# Allegro board WIRELESS_BOARD_19may15_1310.brd
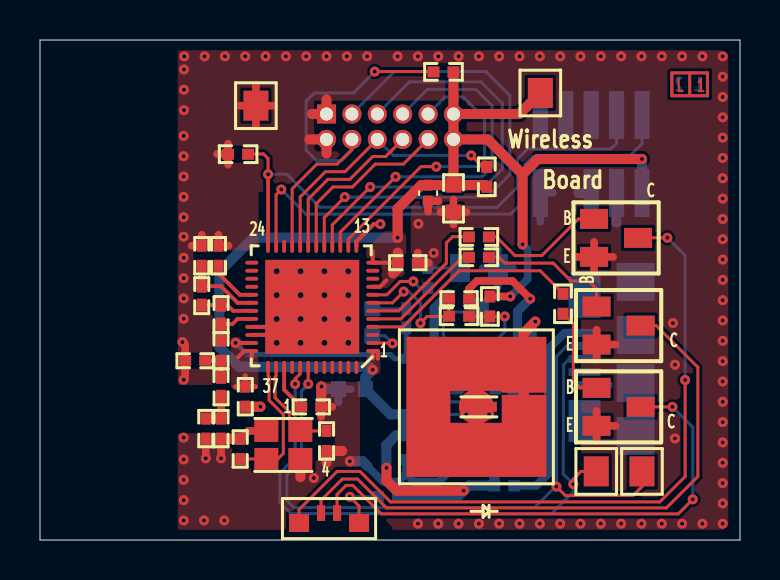
[diagram p0: board, top side]
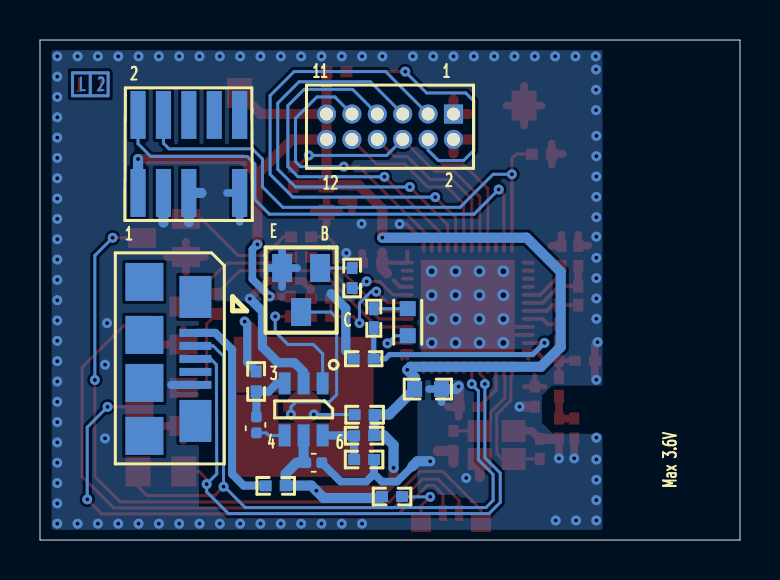
[diagram p1: board, bottom side, seen from below]

Outline 35 x 25 mm; copper layers: TOP, BOTTOM. Coordinates in mm from the lower left corner of the outline.
Outline path: 0,25 0,0 35,0 35,25 0,25

## Design rules (mm)
net group DEFAULT: nets DEC1 DEC2 GPIO_1 GPIO_2 GPIO_3 GPIO_4 GPIO_5 GPIO_6 LED_BLUE LED_GREEN LED_RED N13796 N13800 N17550 N6920326 N6921954 N6922014 N6922833 N6923020 N6923221 N69197330 N69197331 N69219020 N69227890 SCL SDA SNS SWDCLK SWDIO TOUCH_KEY TOUCHLIGHT UART_RX UART_TX XC1 XC2
net group POWER: nets ANT ANT1 ANT2 AVDD GND_SIGNAL N6850852 N6850940 N6930141 SNSK VDD VDD PA

## Placement (name value [footprint] x y rotation side)
C1  1uF  [C0402#2]  19.41 17.74 270 top
C2  4.7uF  [C0603]  20.68 17.07 270 top
C3  2.2nF  [C0402]  8.09 14.21 90 top
C4  47nF  [C0402]  8.93 14.21 90 top
C5  100nF  [C0402]  18.39 13.87 0 top
C6  2.2pF  [C0402]  9.05 9.46 270 top
C7  0.8pF  [C0402]  7.76 8.96 180 top
C8  1nF  [C0402]  10.26 7.17 270 top
C9  100nF  [C0402]  13.56 6.66 0 top
C10  1.5pF  [C0402]  8.29 5.57 270 top
C11  1.5pF  [C0402]  9.05 5.57 270 top
C12  12pF  [C0402]  14.33 4.95 90 top
C13  12pF  [C0402]  10.01 4.55 270 top
C14  1uF  [C0402]  18.81 9.06 0 bottom
C15  4.7uF  [C0603]  15.6 7.55 180 bottom
C17  6.8nF  [C0603#2]  24.18 6.16 270 bottom
C19  100nF  [C0402#2]  21.71 3.86 180 bottom
C29  100nF  [C0402]  20.95 12.06 0 top
D1  LED_3  [LED0402]  21.95 6.66 0 top
D2  RGB_LED  [LED4P_APFA3010SEEZGQBDC]  14.45 1.1 0 top
GND  TEST POINT  [TP]  10.79 21.72 0 top
L1  10nH  [L0402]  8.09 12.22 270 top
L2  4.7nH  [L0402]  9.05 11.27 270 top
L3  3.3nH  [L0402]  9.05 7.66 270 top
L4  15nH  [L0402]  18.31 11.09 270 bottom
L5  10uH  [L0603]  16.61 10.89 90 bottom
NOREF  -  []  0 0 90 top
NOREF#2  -  []  0 0 0 top
P1  20021112-00020T1LF  [CONN20PIN_20021112_RA]  14.33 21.3 0 top
P2  FTSH-105  [FTSH-105-01-L-DV]  27.56 19.3 180 bottom
Q1  NPN BCE  [SOT23]  28.8 15.11 0 top
Q2  NPN BCE  [SOT23]  28.93 10.72 0 top
Q3  NPN BCE  [SOT23]  28.93 6.66 0 top
Q5  NPN BCE  [SOT23]  21.95 12.5 270 bottom
R1  10K  [R0402]  20.18 23.42 0 top
R2  12K  [R0402]  9.91 19.3 0 top
R3  10K  [R0402]  22.35 18.16 270 top
R4  23K  [R0402]  21.95 15.17 0 top
R5  23K  [R0402]  21.95 14.15 0 top
R6  23K  [R0402]  26.16 11.81 270 top
R7  33  [R0402]  17.4 2.16 0 bottom
R11  23K  [R0402]  19.41 13.1 90 bottom
R12  DNM  [R0402]  22.48 11.68 90 top
R13  4.7K  [R0402]  24.18 7.93 270 bottom
R14  33  [R0402]  18.77 6.28 180 bottom
R16  DNM  [R0402]  23.22 2.72 180 bottom
R17  33  [R0402]  18.8 4.01 0 bottom
R18  DNM  [R0402]  18.8 5.23 180 bottom
R27  4.7K  [R0402]  20.95 11.18 180 top
RX  TEST POINT  [TP]  30.1 3.43 0 top
TX  TEST POINT  [TP]  27.81 3.43 0 top
U1  nRF51822-QFAA  [QFN40P600X600X90-48N]  13.61 11.66 0 top
U2  DNM  [TP_40RD_SMT]  21.82 6.66 0 top
U3  microusb  [USB_10118192AC]  28.51 9.06 270 bottom
U4  AT42QT1011  [SOP95P280X145-6N]  21.82 6.53 270 bottom
VDD  TEST POINT  [TP]  25.02 22.35 0 top
X2  16MHz  [BT-XTAL_2520]  12.17 4.75 180 top

## Library data of the parts
C1 C17 C19 = CAPACITOR: alternate symbols: (CAPC1005X60L,CAPC1005X60M)
C2 C29 = CAPACITOR
C3-C15 = CAPACITOR NON-POL
D1 = LED_3
D2 = RGB_LED
GND RX TX VDD = TEST POINT
L1-L5 = INDUCTOR
P1 = CONN RCPT 10x2_1
P2 = FTSH-105
Q1-Q3 Q5 = NPN BCE_0: User Part Number: PART_NO; Tolerance: TOLERANCE
R1-R7 R11-R14 R16-R18 R27 = RESISTOR
U1 = nRF51822-QFAA_0
U2 = Sense Electrode
U3 = microusb
U4 = AT42QT1012_0
X2 = CRYSTAL_1

## Footprints (pads in the part's own frame, mm; a bottom-side part is the same pattern mirrored in y, then rotated)
BT-XTAL_2520
  rect 1.199x1.1 smd: 1(-0.851,-0.701) 2(0.851,-0.701) 3(0.851,0.701) 4(-0.851,0.701)
C0402
  rect 0.599x0.5 smd: 1(-0.5,0) 2(0.5,0)
C0402#2
  custom 0.549x0.538 smd: 1(0,0) 2(0.8,0)
C0603
  rect 0.749x0.8 smd: 1(-0.673,0) 2(0.673,0)
C0603#2
  custom 0.549x0.538 smd: 1(0,0) 2(0.8,0)
CONN20PIN_20021112_RA
  rect 0.955x0.955 hole 0.65: 1(0,0)
  round 0.955 hole 0.65: 2(0,-1.27) 3(1.27,0) 4(1.27,-1.27) 5(2.54,0) 6(2.54,-1.27) 7(3.81,0) 8(3.81,-1.27) 9(5.08,0) 10(5.08,-1.27) 11(6.35,0) 12(6.35,-1.27)
FTSH-105-01-L-DV
  rect 0.759x2.398 smd: 1(-2.54,-1.951) 2(-2.54,1.951) 3(-1.27,-1.951) 4(-1.27,1.951) 5(0,-1.951) 6(0,1.951) 8(1.27,1.951) 9(2.54,-1.951) 10(2.54,1.951)
L0402
  rect 0.65x0.5 smd: 1(-0.475,0) 2(0.475,0)
L0603
  rect 0.749x0.8 smd: 1(-0.676,0) 2(0.676,0)
LED4P_APFA3010SEEZGQBDC
  rect 1.001x0.899 smd: 1(-1.501,-0.249) 2(1.501,-0.249)
  rect 0.406x0.787 smd: 3(0.401,0.249) 4(-0.401,0.249)
LED0402
  rect 0.701x0.5 smd: A(-0.549,0) K(0.549,0)
QFN40P600X600X90-48N
  oval 0.65x0.193 smd: 1(3.025,-2.207) 2(3.025,-1.806) 3(3.025,-1.405) 4(3.025,-1.003) 5(3.025,-0.602) 6(3.025,-0.201) 7(3.025,0.201) 8(3.025,0.602) 9(3.025,1.003) 10(3.025,1.405) 11(3.025,1.806) 12(3.025,2.207) 25(-3.025,2.207) 26(-3.025,1.806) 27(-3.025,1.405) 28(-3.025,1.003) 29(-3.025,0.602) 30(-3.025,0.201) 31(-3.025,-0.201) 32(-3.025,-0.602) 33(-3.025,-1.003) 34(-3.025,-1.405) 35(-3.025,-1.806) 36(-3.025,-2.207)
  oval 0.193x0.65 smd: 13(2.207,3.025) 14(1.806,3.025) 15(1.405,3.025) 16(1.003,3.025) 17(0.602,3.025) 18(0.201,3.025) 19(-0.201,3.025) 20(-0.602,3.025) 21(-1.003,3.025) 22(-1.405,3.025) 23(-1.806,3.025) 24(-2.207,3.025) 37(-2.207,-3.025) 38(-1.806,-3.025) 39(-1.405,-3.025) 40(-1.003,-3.025) 41(-0.602,-3.025) 42(-0.201,-3.025) 43(0.201,-3.025) 44(0.602,-3.025) 45(1.003,-3.025) 46(1.405,-3.025) 47(1.806,-3.025) 48(2.207,-3.025)
  rect 4.699x4.699 smd: 49(0,0)
R0402
  rect 0.599x0.551 smd: 1(-0.5,0) 2(0.5,0)
SOP95P280X145-6N
  rect 1.1x0.599 smd: 1(-1.3,0.95) 2(-1.3,0) 3(-1.3,-0.95) 4(1.3,-0.95) 5(1.3,0) 6(1.3,0.95)
SOT23
  rect 1.4x1.001 smd: B(-1.1,0.95) C(1.1,0) E(-1.1,-0.95)
TP
  rect 1.25x1.501 smd: 1(0,0)
TP_40RD_SMT
  custom 7x7 smd: 1(0,0)
USB_10118192AC
  rect 1.9x1.9 smd: (-3.851,-1.275) (-1.199,-1.275) (1.201,-1.275) (3.851,-1.275)
  rect 2.101x1.6 smd: (-3.099,1.275) (3.101,1.275)
  rect 0.399x1.6 smd: 1(-1.3,1.275) 2(-0.65,1.275) 3(0,1.275) 4(0.65,1.275) 5(1.3,1.275)

## Nets
AVDD: C8.1 C14.1 L4.2 U1.35(AVDD1) U1.36(AVDD)
GND_SIGNAL: C1.2 C2.2 C3.2 C4.2 C5.2 C7.2 C8.2 C9.2 C10.2 C11.2 C12.1 C13.1 C14.2 C15.2 C19.2 C29.2 GND.1 P1.1 P1.2 P2.3 P2.5 P2.9 Q1.E Q2.E Q3.E Q5.E R2.1 R17.1 U1.13(VSS) U1.33(VSS1) U1.34(VSS2) U1.49(EPAD) U3.5 U4.2(GND) X2.2 X2.4
VDD: C1.1 C2.1 C5.1 C15.1 C19.1 P1.11 P1.12 P2.1 R1.2 R3.2 R7.2 R12.2 R14.2 R16.2 R18.2 U1.1(VDD) U1.9(P0.05) U1.12(VDD1) U4.5(VDD) VDD.1
VDD PA: C3.1 L1.1 U1.30(VDD_PA)
ANT: C10.1 C11.1 L3.2
ANT1: L1.2 L2.1 U1.31(ANT1)
ANT2: C6.1 L2.2 U1.32(ANT2)
DEC1: C9.1 U1.39(DEC1)
DEC2: C4.1 U1.29(DEC2)
GPIO_1: P1.8 U1.19(P0.13)
GPIO_2: P1.10 U1.18(P0.12)
GPIO_3: P1.3 U1.17(P0.11)
GPIO_4: P1.5 U1.16(P0.10)
GPIO_5: P1.7 U1.15(P0.09)
GPIO_6: P1.9 U1.14(P0.08)
LED_BLUE: R5.1 U1.5(P0.01)
LED_GREEN: R6.1 U1.4(P0.00)
LED_RED: R4.1 U1.6(P0.02)
SCL: P1.4 R1.1 U1.21(P0.15)
SDA: P1.6 R3.1 U1.20(P0.14)
SNS: C17.2 U4.4(SNS)
SNSK: C17.1 R13.2 U4.3(SNSK)
SWDCLK: P2.4 R2.2 U1.24(SWDCLK)
SWDIO: P2.2 U1.23(SWDIO/NRESET)
TOUCH_KEY: C29.1 R27.2 U1.7(P0.03)
TOUCHLIGHT: R11.1 U1.8(P0.04)
UART_RX: RX.1 U1.42(P0.23) U3.2
UART_TX: TX.1 U1.41(P0.22) U3.3
XC1: C13.2 U1.37(XC1) X2.3
XC2: C12.2 U1.38(XC2) X2.1
N13796: L4.1 L5.2
N13800: L5.1 U1.2(DCC)
N17550: C6.2 C7.1 L3.1
N6850732: R12.1 R27.1 U4.1(OUT)
N6850852: R17.2 R18.1 U4.6(MODE)
N6850940: R13.1 U2.1
N6920326: D1.A(ANODE) R14.1
N6921954: D2.2(A) R7.1
N6922014: D2.1(R) Q1.C
N6922833: D2.4(B) Q2.C
N6923020: D2.3(G) Q3.C
N6923221: Q3.B R6.2
N6930141: R16.1 U3.1
N69197330: Q5.B R11.2
N69197331: D1.K(CATHODE) Q5.C
N69219020: Q1.B R4.2
N69227890: Q2.B R5.2

Pads without a net: P2 6 8 10; U1 3 10 11 22 25 26 27 28 40 43 44 45 46 47 48; U3 4

## Via types
v1: diameter 0.5, hole 0.201, TOP to BOTTOM, 133 vias
v2: diameter 0.599, hole 0.3, TOP to BOTTOM, 16 vias

## Routing (per net, layer and track width the routed paths; a pad name or vN(x,y) marks a point on that pad's centre or on a via; arc(x,y) is an arc through that point)
AVDD: length 14
  TOP w0.203: 10.59,9.06 U1.36 10.21,9.45 9.91,9.14 ; 9.78,9.85 U1.35
  TOP w0.254: C8.1 10.77,7.67 ; C8.1 10.26,8.22 ; C8.1 9.76,7.67 ; v1(9.78,9.86) 9.78,9.85
  BOTTOM w0.254: v1(9.78,9.86) 10.36,9.27 17.53,9.27 17.73,9.06 C14.1 L4.2
GND_SIGNAL: length 72.9
  TOP w0.203: U1.34 11.44,10.25 v2(11.83,9.86) ; U1.33 11.44,10.66 v2(11.83,11.05) ; v1(17.02,15.8) 16.69,15.8 15.82,14.93 U1.13
  TOP w0.381: 26.75,14.16 Q1.E ; Q1.E 27.7,13.4 ; Q1.E 27.7,14.91 ; Q1.E 28.66,14.16 ; 19.44,13.87 C5.2 18.89,14.37 ; 9.43,14.71 C4.2 8.93,15.27 ; C2.2 21.33,16.4 ; C2.2 20.68,17.03 ; C2.2 20.68,15.77 ; C2.2 20.02,16.4 ; 9.92,21.72 GND.1 ; GND.1 11.67,21.72 ; GND.1 10.79,22.72 ; GND.1 10.79,20.71 ; Q2.E 27.83,10.52 ; Q2.E 27.83,9.02 ; Q2.E 28.78,9.77 ; v1(7.18,8.01) 7.26,8.09 C7.2 7.26,9.76 v1(7.12,9.9) ; 8.85,19.3 R2.1 ; R2.1 9.41,18.76 ; R2.1 9.41,19.82 ; C29.2 21.46,12.57 21.84,12.95 23.62,12.95 v1(24.51,12.06) ; X2.2 10.41,5.45 C13.1 ; 19.41,16.42 C1.2 19.93,16.94 ; 14.62,6.66 C9.2 14.06,6.15 ; 27.83,4.96 Q3.E ; Q3.E 27.83,6.46 ; Q3.E 28.78,5.71 ; 8.09,15.27 C3.2 7.58,14.71 ; v1(9.05,4.08) C11.2 ; C10.2 v1(8.29,4.08)
  TOP w0.508: C13.1 9.07,5.05 C11.2 ; 13.6,21.3 P1.1 14.33,22.03 ; 14.33,19.33 P1.2 13.47,20.03 ; 15.11,4.45 C12.1 14.33,3.87 ; C9.2 14.06,7.67 v1(14.07,7.67) ; X2.4 13.02,3.14 ; C8.2 v1(11.02,6.66)
  BOTTOM w0.381: 25.02,15.9 P2.9 25.65,17.35 ; C19.2 19.97,2.92 18.68,2.92 18.3,3.31 ; 14.92,6.89 C15.2 15.55,7.55 ; 22.14,13.6 Q5.E ; Q5.E 22.9,14.55 ; Q5.E 22.9,12.65 ; Q5.E 23.65,13.6 ; 18.3,3.31 17.91,2.92 17.14,2.92 16.38,3.68 ; 18.3,3.31 R17.1
  BOTTOM w0.406: U3.5 28.44,7.75
  BOTTOM w0.457: 20.45,12.32 19.71,11.58 19.71,9.46 C14.2 ; v1(24.51,12.06) 23.88,11.43 23.88,9.65 23.09,8.86 22.28,8.86 21.82,8.41 U4.2
  BOTTOM w0.508: 16.38,3.68 16.13,3.94 v1(15.49,3.94) ; C15.2 14.2,7.55 v1(14.07,7.67) ; P2.3 28.83,15.88 ; 27.56,15.9 P2.5 26.93,17.35
  vias: v1(7.21,24.18) v1(7.2,23.53) v1(7.2,22.51) v1(7.2,21.5) v1(7.18,20.21) v1(7.18,19.19) v1(7.18,18.17) v1(7.18,17.16) v1(7.18,16.14) v1(7.18,15.17) v1(7.18,14.11) v1(7.18,13.09) v1(7.18,12.08) v1(7.18,11.06) v1(7.18,5.12) v1(7.18,4.03) v1(7.18,3.01) v1(7.18,1.99) v1(7.18,0.98) v1(8.23,24.18) v1(8.2,0.98) v1(9.25,24.18) v1(9.22,0.98) v1(10.26,24.18) v1(11.28,24.18) v1(12.29,24.18) v1(13.31,24.18) v1(13.69,3.1) v1(14.33,24.18) v1(15.34,24.18) v1(16.36,24.18) v1(17.88,24.18) v1(18.9,24.18) v1(18.92,15.81) v1(18.9,0.82) v1(19.68,14.35) v1(19.91,24.18) v1(19.91,0.82) v1(20.93,24.18) v1(20.93,0.82) v1(21.95,24.18) v1(21.95,0.82) v1(22.96,24.18) v1(22.96,0.82) v1(23.98,24.18) v1(23.98,0.82) v1(24.99,24.18) v1(24.99,0.82) v1(26.01,24.18) v1(26.01,0.82) v1(27.03,24.18) v1(27.03,0.82) v1(28.04,24.18) v1(28.04,0.82) v1(29.06,24.18) v1(29.06,0.82) v1(30.07,24.18) v1(30.07,0.82) v1(31.09,24.18) v1(31.09,0.82) v1(31.65,10.85) v1(31.75,8.76) v1(31.75,5.08) v1(32.11,24.18) v1(32.11,0.82) v1(33.12,24.18) v1(33.12,0.82) v1(34.14,24.18) v1(34.14,23.17) v1(34.14,22.15) v1(34.14,21.14) v1(34.14,20.12) v1(34.14,19.1) v1(34.14,18.09) v1(34.14,17.07) v1(34.14,16.06) v1(34.14,15.04) v1(34.14,14.02) v1(34.14,13.01) v1(34.14,11.99) v1(34.14,10.98) v1(34.14,9.96) v1(34.14,8.94) v1(34.14,7.93) v1(34.14,6.91) v1(34.14,5.9) v1(34.14,4.88) v1(34.14,3.86) v1(34.14,2.85) v1(34.14,1.83) v1(34.14,0.82) v2(11.83,13.44) v2(11.83,12.24) v2(13.03,13.44) v2(13.03,12.24) v2(13.03,11.05) v2(13.03,9.86) v2(14.22,13.44) v2(14.22,12.24) v2(14.22,11.05) v2(14.22,9.86) v2(15.42,13.44) v2(15.42,12.24) v2(15.42,11.05) v2(15.42,9.86)
VDD: length 83
  TOP w0.203: 16.89,9.07 16.89,9.45 U1.1 16.64,9.07 ; 17.32,12.98 17.01,12.66 U1.9 ; 16.64,14.43 U1.12 C5.1
  TOP w0.381: R12.2 v1(23.51,12.18)
  TOP w0.508: 24.13,18.29 24.89,19.05 v1(30.1,19.05) ; 24.13,18.29 22.39,20.03 P1.12 ; 24.13,18.29 v1(24.13,14.78) ; VDD.1 23.97,21.3 P1.11 ; v1(21.18,2.47) 17.83,2.47 17.32,2.97 v1(17.32,3.61) ; 17.89,14.37 C5.1 17.89,13.57 17.65,13.34 ; P1.11 P1.12 ; P1.11 R1.2 ; P1.12 C2.1 ; C2.1 C1.1 19.06,17.74 17.88,16.56 v1(17.88,15.12) 17.89,15.11 ; C2.1 22.27,17.74 R3.2
  BOTTOM w0.381: v1(24.13,14.78) 24.38,14.53 24.38,13.05 v1(23.51,12.18)
  BOTTOM w0.508: R7.2 17.96,2.1 20.82,2.1 v1(21.18,2.47) 21.44,2.72 R16.2 22.72,3.32 22.17,3.86 C19.1 21.82,3.97 U4.5 ; v1(17.88,15.12) 10.67,15.12 8.97,13.41 8.97,9.65 9.95,8.66 16.48,8.66 v1(16.64,8.51) 16.27,8.14 C15.1 17.54,6.28 R14.2 18.3,6.25 R18.2 17.8,5.23 17.32,4.75 v1(17.32,3.61) ; P2.1 v1(30.1,19.05)
VDD PA: length 3.9
  TOP w0.191: L1.1 9.05,12.69 9.88,11.86 U1.30
  TOP w0.381: C3.1 L1.1
ANT: length 1.9
  TOP w0.381: C10.1 C11.1 L3.2
ANT1: length 2.6
  TOP w0.191: U1.31 9.66,11.46 9.37,11.74 L2.1 L1.2
ANT2: length 2.5
  TOP w0.191: U1.32 9.88,11.06 9.62,10.79 L2.2
  TOP w0.229: C6.1 L2.2
DEC1: length 2.3
  TOP w0.191: C9.1 12.21,7.51 U1.39
DEC2: length 2.5
  TOP w0.191: C4.1 8.93,13.33 9.99,12.26 U1.29
GPIO_1: length 8.3
  TOP w0.15: P1.8 17.28,19.18 16.64,19.18 15.49,18.03 14.4,18.03 13.41,17.05 U1.19
GPIO_2: length 9.1
  TOP w0.15: U1.18 13.81,16.81 14.65,17.65 15.62,17.65 16.76,18.8 18.17,18.8 P1.10
GPIO_3: length 24.8
  TOP w0.15: U1.17 14.21,16.12 v1(15.24,17.14)
  BOTTOM w0.15: v1(15.24,17.14) 22.36,17.14 23.5,18.28 23.5,22.22 22.3,23.42 17.72,23.42 P1.3
GPIO_4: length 21.4
  TOP w0.15: v1(16.51,17.65) 14.62,15.76 U1.16
  BOTTOM w0.15: P1.5 18.48,22.91 22.04,22.91 23.11,21.84 23.11,18.54 22.23,17.65 v1(16.51,17.65)
GPIO_5: length 18
  TOP w0.15: v1(17.78,18.16) 15.02,15.4 U1.15
  BOTTOM w0.15: P1.7 19.37,22.53 21.79,22.53 22.61,21.72 22.61,18.67 22.1,18.16 v1(17.78,18.16)
GPIO_6: length 14.5
  TOP w0.15: v1(19.81,18.67) 19.05,18.67 15.42,15.04 U1.14
  BOTTOM w0.15: v1(19.81,18.67) 21.97,18.67 22.23,18.92 22.23,21.08 21.16,22.15 20.26,22.15 P1.9
LED_BLUE: length 6.1
  TOP w0.152: U1.5 18.04,11.06 21.13,14.15 R5.1
LED_GREEN: length 11.2
  TOP w0.152: U1.4 18.15,10.66 20.95,13.46 25.01,13.46 R6.1
LED_RED: length 6.9
  TOP w0.152: U1.6 17.93,11.46 20.32,13.85 20.32,14.86 20.63,15.17 R4.1
SCL: length 19.9
  TOP w0.15: P1.4 15.6,19.53 14.86,18.8 13.84,18.8 12.61,17.56 U1.21 ; R1.1 v1(16.74,23.42)
  BOTTOM w0.15: P1.4 15.6,19.48 15.09,18.98 13.82,18.98 13.31,19.48 13.31,21.95 13.71,22.35 15.67,22.35 v1(16.74,23.42)
SDA: length 13.6
  TOP w0.15: R3.1 22.13,18.66 v1(21.56,19.23) ; U1.20 13.01,17.15 14.27,18.41 15.25,18.41 P1.6
  BOTTOM w0.15: v1(21.56,19.23) 17.67,19.23 P1.6
SNS: length 1.5
  BOTTOM w0.15: C17.2 23.69,5.36 23.57,5.23 U4.4
SNSK: length 2.8
  BOTTOM w0.406: C17.1 R13.2 23.56,7.43 23.16,7.83 U4.3
SWDCLK: length 27.2
  TOP w0.15: v1(11.4,18.29) 11.4,19.08 11.18,19.3 R2.2
  TOP w0.191: U1.24 v1(11.4,18.29)
  BOTTOM w0.15: v1(11.4,18.29) 12.34,18.29 14,16.64 22.86,16.64 23.88,17.65 23.88,19.05 24.38,19.56 28.55,19.56 28.83,19.84 P2.4
SWDIO: length 25.4
  TOP w0.15: U1.23 11.81,17.27 v1(12.06,17.53)
  BOTTOM w0.15: v1(12.06,17.53) 13.29,16.3 13.29,16.29 23.53,16.29 24.26,17.02 24.26,18.8 24.64,19.18 29.46,19.18 30.1,19.81 P2.2
TOUCH_KEY: length 6.3
  TOP w0.15: C29.1 R27.2 ; v1(18.19,12.42) 17.63,11.86 U1.7
  TOP w0.152: R27.2 19.35,11.18 v1(19.02,10.85)
  BOTTOM w0.15: v1(18.19,12.42) 18.45,12.42 19.02,11.84 v1(19.02,10.85)
TOUCHLIGHT: length 3.2
  TOP w0.15: v1(18.67,12.93) 18.01,12.93 17.34,12.26 U1.8
  BOTTOM w0.15: v1(18.67,12.93) 19,12.6 R11.1
UART_RX: length 34.7
  TOP w0.15: RX.1 30.1,2.67 29.65,2.22 26.27,2.22 v1(25.82,2.67) ; v1(13.41,7.8) U1.42
  BOTTOM w0.15: U3.2 26.34,9.71 25.82,9.19 v1(25.82,2.67) 25.78,2.67 24.73,1.62 12.71,1.62 12.34,1.98 12.34,3.28 13.08,4.01 13.08,7.45 13.23,7.6 13.23,7.62 v1(13.41,7.8)
UART_TX: length 31.8
  TOP w0.15: v1(12.76,7.8) 12.76,8.06 13.01,8.31 U1.41 ; v1(26.67,2.79) 26.67,3.05 27.05,3.43 TX.1
  BOTTOM w0.15: v1(12.76,7.8) 12.76,4.11 11.99,3.35 11.99,1.88 12.55,1.32 25.58,1.32 26.67,2.41 v1(26.67,2.79) 26.16,3.3 26.18,8.69 26.18,8.78 26.46,9.06 U3.3
XC1: length 6.9
  TOP w0.15: U1.37 11.4,8.21 11.46,8.16 11.46,6.99 12.17,6.28 12.17,4.33 11.89,4.05 X2.3 C13.2
XC2: length 5
  TOP w0.15: C12.2 X2.1 12.47,6 12.47,6.4 11.76,7.11 11.76,8.16 11.81,8.21 U1.38
N13796: length 1.7
  BOTTOM w0.15: L5.2 L4.1
N13800: length 2.2
  TOP w0.15: v1(17.63,9.83) 17.61,9.85 U1.2
  BOTTOM w0.15: v1(17.63,9.83) 17.25,10.21 L5.1
N17550: length 1.6
  TOP w0.229: L3.1 C6.2 C7.1
N6850732: length 6.9
  TOP w0.15: R27.1 R12.1 v1(23.24,11.18)
  BOTTOM w0.152: U4.1 20.87,9.31 21.34,9.78 22.61,9.78 23.24,10.41 v1(23.24,11.18)
N6850852: length 2.8
  BOTTOM w0.406: U4.6 R18.1 R17.2
N6850940: length 6.8
  TOP w0.508: v1(24.77,10.92) 24.18,10.34 24.18,7.06
  BOTTOM w0.406: R13.1 24.64,8.88 24.64,10.79 v1(24.77,10.92)
N6920326: length 2.5
  TOP w0.15: v1(21.31,6.28) 21.31,6.57 D1.A
  BOTTOM w0.15: v1(21.31,6.28) R14.1
N6921954: length 2.9
  TOP w0.15: D2.2 15.95,1.7 v1(15.49,2.16)
  BOTTOM w0.15: R7.1 v1(15.49,2.16)
N6922014: length 35.7
  TOP w0.15: v1(32.26,8) 32.26,3.17 30.99,1.91 17.53,1.91 16,3.43 14.86,3.43 12.95,1.52 D2.1 ; Q1.C 29.91,15.11 v1(31.37,15.11)
  BOTTOM w0.15: v1(32.26,8) 32.26,14.22 v1(31.37,15.11)
N6922833: length 30.4
  TOP w0.15: Q2.C 30.81,10.72 32.89,8.64 32.89,3.17 31.32,1.61 17.32,1.61 15.88,3.05 15.11,3.05 14.05,1.99 D2.4
N6923020: length 26.4
  TOP w0.15: D2.3 14.85,2.28 15.3,2.73 15.64,2.73 17.06,1.31 31.91,1.31 v1(32.64,2.03) ; Q3.C v1(31.62,6.66)
  BOTTOM w0.15: v1(32.64,2.03) 32.64,5.64 v1(31.62,6.66)
N6923221: length 4.9
  TOP w0.152: R6.2 26.67,10.8 26.67,7.95 27.01,7.61 Q3.B
N6930141: length 10.3
  BOTTOM w0.406: R16.1 24.82,2.72 25.39,3.3 25.39,9.52 26.23,10.36 U3.1
N69197330: length 1.6
  BOTTOM w0.15: Q5.B R11.2
N69197331: length 9.1
  TOP w0.15: v1(22.45,6.28) 22.49,6.32 D1.K
  BOTTOM w0.15: v1(22.45,6.28) 22.45,6.65 22.2,6.91 20.52,6.91 20.17,7.26 20.17,11.1 20.46,11.4 Q5.C
N69219020: length 6.4
  TOP w0.152: Q1.B 26.92,16.06 25.09,14.22 23.75,14.22 22.81,15.17 R4.2
N69227890: length 6.9
  TOP w0.152: Q2.B 27.83,12.56 27.43,12.95 26.55,12.95 25.66,13.84 23.24,13.84 22.93,14.15 R5.2

## Copper pours and planes (outline as drawn; the poured copper is in the pictures)
AVDD on TOP: 10.68,10.15 9.55,10.15 9.55,7.67 9.87,7.34 10.62,7.34 10.92,7.65 10.92,9.91
GND_SIGNAL on TOP: 6.89,0.51 6.89,5.33 8.64,5.33 8.64,4.95 13.84,4.95 13.84,7.9 16,7.9 16,2.11 15.22,2.11 15.19,2.1 15.15,2.08 15.11,2.04 15.1,1.98 15.11,1.95 15.15,1.91 15.2,1.89 16,1.89 16,1.52 16.68,1.52 16.71,1.52 17.28,1.52 17.29,1.52 19.18,1.52 19.18,1.57 26.11,1.57 26.11,1.65 27.05,1.65 27.05,11.18 25.97,11.18 24.38,12.76 24.39,12.79 24.4,12.85 24.37,12.9 24.01,13.26 23.98,13.28 23.94,13.29 23.88,13.29 23.88,13.34 19.68,13.34 19.68,13.21 19.56,13.21 19.56,12.57 18.54,12.57 18.54,18.03 20.45,18.03 20.45,18.54 21.34,18.54 21.34,21.97 13.72,21.97 13.72,19.56 13.84,19.43 14.86,19.43 14.99,19.3 14.99,18.04 14.34,17.4 10.93,17.4 10.93,14.86 10.54,14.48 8.64,14.48 8.64,7.75 6.89,7.75 6.89,24.49 34.05,24.49 34.42,24.13 34.42,0.76 34.16,0.51 ; 4 cut-outs
GND_SIGNAL on BOTTOM: 6.88,0.51 6.88,5.31 9.35,5.31 9.91,5.87 9.91,7.21 9.4,7.72 6.88,7.72 6.88,24.49 34.42,24.49 34.42,2.97 34.43,2.97 34.43,0.51 ; 7 cut-outs
VDD on TOP: 18.11,15.45 17.23,15.45 16.31,14.52 16.31,12.67 16.38,12.6 17.52,12.6 18.31,13.39 18.31,15.25

Small or netless copper shapes (teardrops, artwork), in the pictures only: 1 on TOP

## Text on the board
BOTTOM: 2 | L | BOTTOM
Ref Des/Silkscreen Bottom: Max 3.6V
TOP: L | 1 | TOP
Ref Des/Silkscreen Top: Wireless | Board
PAGE_OUTLINE: OUTLINE
DIMENSION: STACKUP INFO | LAYER 1-TOP | LAYER 2-BOT | CORE | 62.992 MILS | (1.6 MM)
TOLERANCE_BOTTOM: 10. IF VIA IN PAD (VIP) SHOULD BE FILLED AND PLATTED WITH PLANNER | NOTES: | 1. ALL ARTWORK PATTERNS ARE VIEWED FROM THE TOP. | 2. PLATING FINISH METHOD SHALL BE HASL | 3. SOLDER MASK OVER BARE COPPER (SMOBC) SHALL | 4. MASK COLOUR IS GREEN AND TYPE IS LPI | 5. BOARD THICKNESS IS 1.6 MM | 6. COPPER THICKNESS | 7. PCB MATERIAL IS FR4 | 8. STACKUP SPECIFICATIONS IS AS FOLLOWS | 9. SIGNAL TRACE WIDTH 6 MILS POWER TRACEWIDTH 30 MILS (MIN 20 MILS) | BE ON BOTH SIDES. | FOR OUTER LAYERS IS 35 MICRONS | FOR INNER LAYERS IS 35 MICRONS
TOLERANCE_TOP: FABRICATION LAYER
COMPVAL_TYPE_TOP: DATE: 19/05/15 | WIRELESS_BOARD_Rev_B
User.12: LAYER2
User.13: LAYER3
User.15: ASSEMBLY_TOP
User.16: ASSEMBLY_BOTTOM
User.17: PASTE_TOP
User.18: PASTE_BOTTOM
User.19: SILK_TOP
User.20: SILK_BOTTOM
User.21: SOLDMASK_BOTTOM
User.22: SOLDMASK_TOP
User.25: FIGURE | SIZE | 7.9 | 11.8 | 25.6 | DRILL CHART: TOP to BOTTOM | ALL UNITS ARE IN MILS | TOLERANCE | +3.0/-3.0 | PLATED | QTY | 133 | 16 | 12
